# Altium PCB H_Bridge_Rev0.2_to_Pads.PcbDoc
Units mm, origin at the board's own origin, x right, y up, seen from the top; angles counter-clockwise.
Board outline 85 x 80 mm, 2 copper layers (Top Layer, Bottom Layer); 44 components, 27 nets, 117 pads, 176 vias.
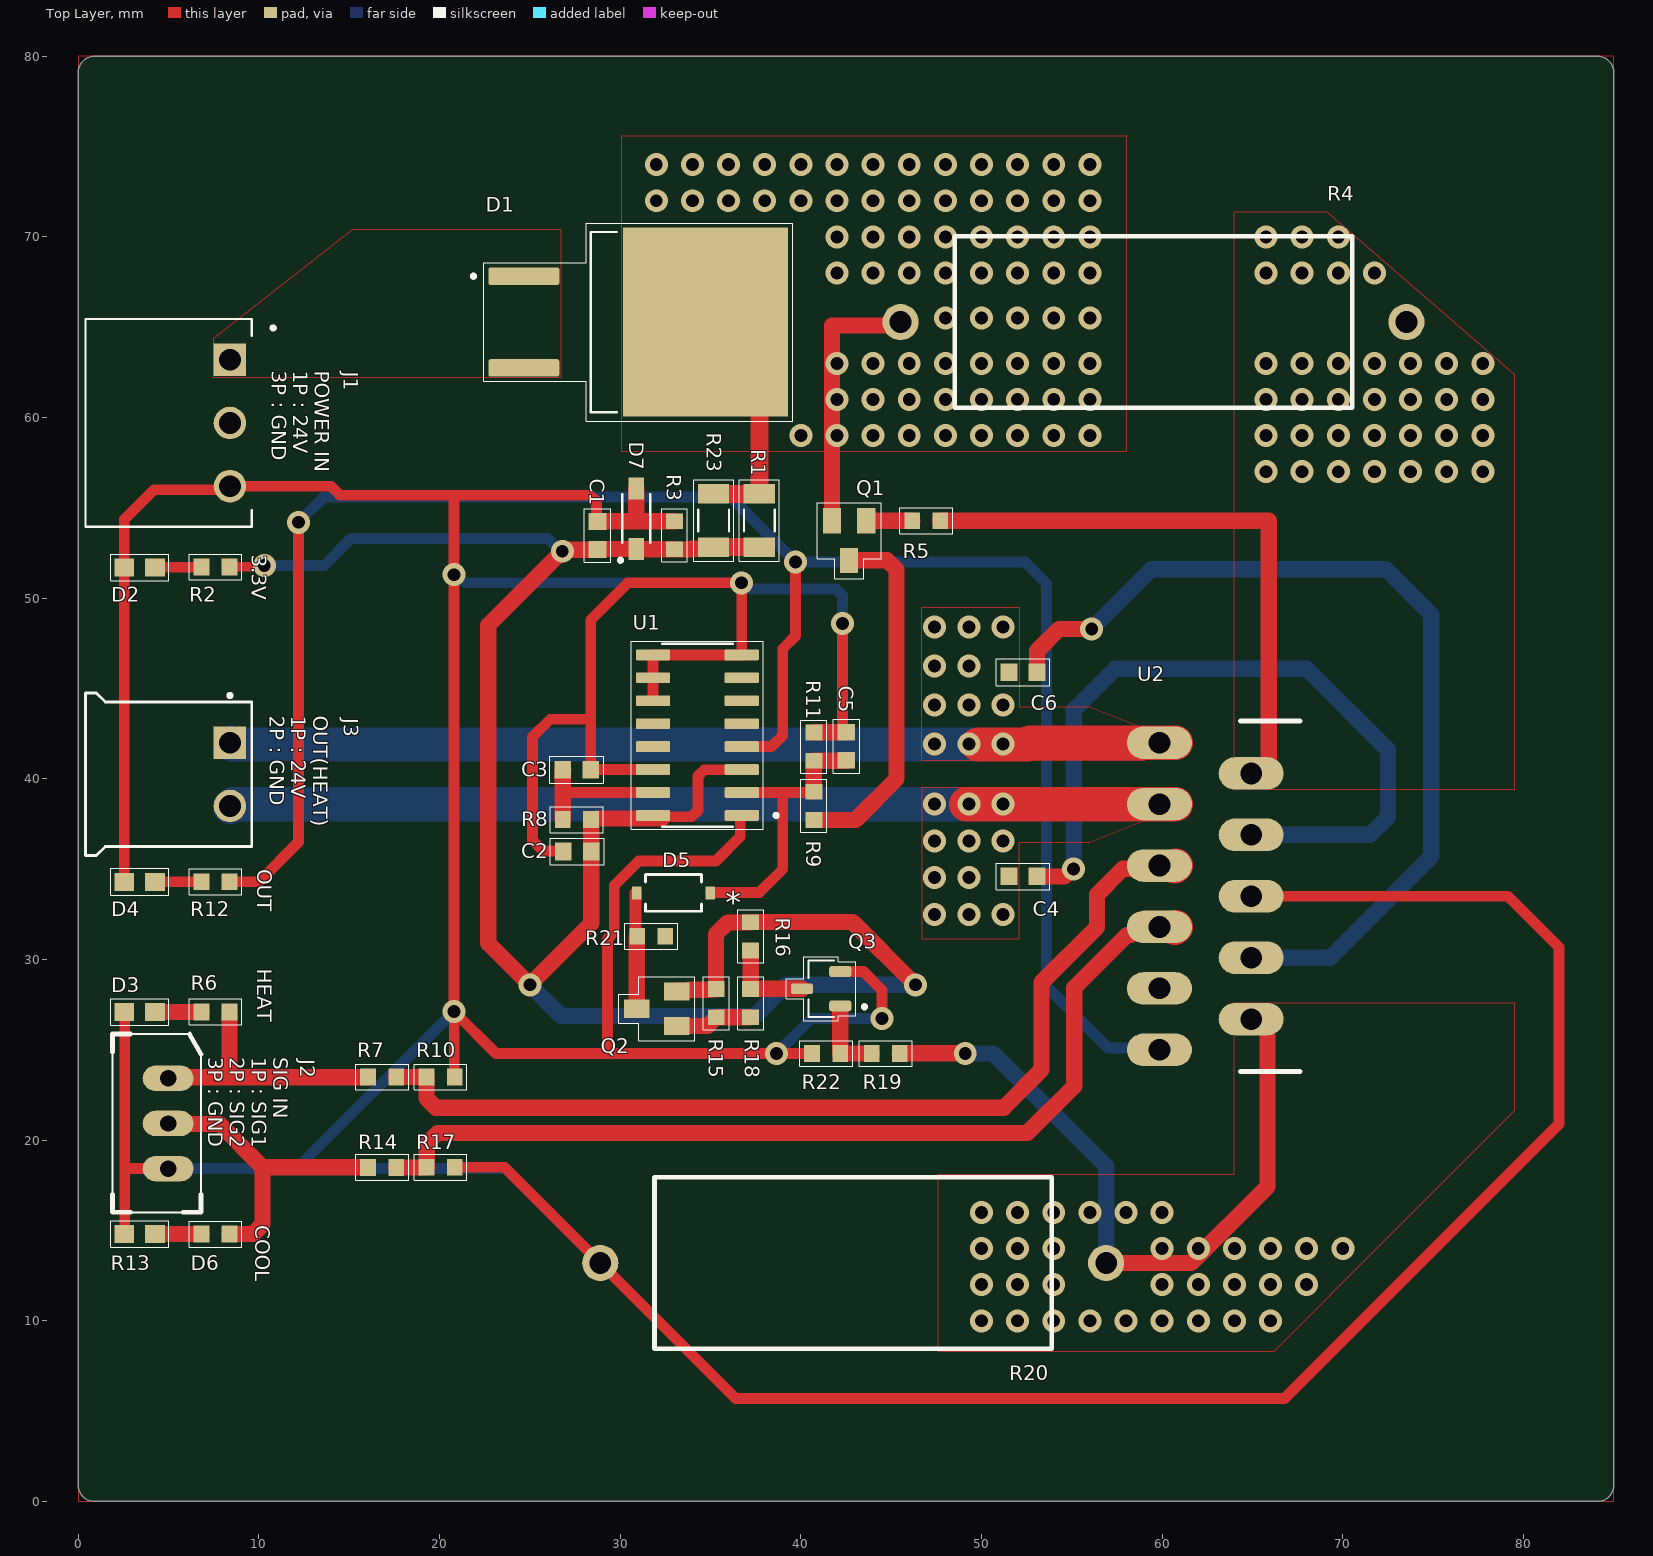
[diagram p0: Top Layer view]
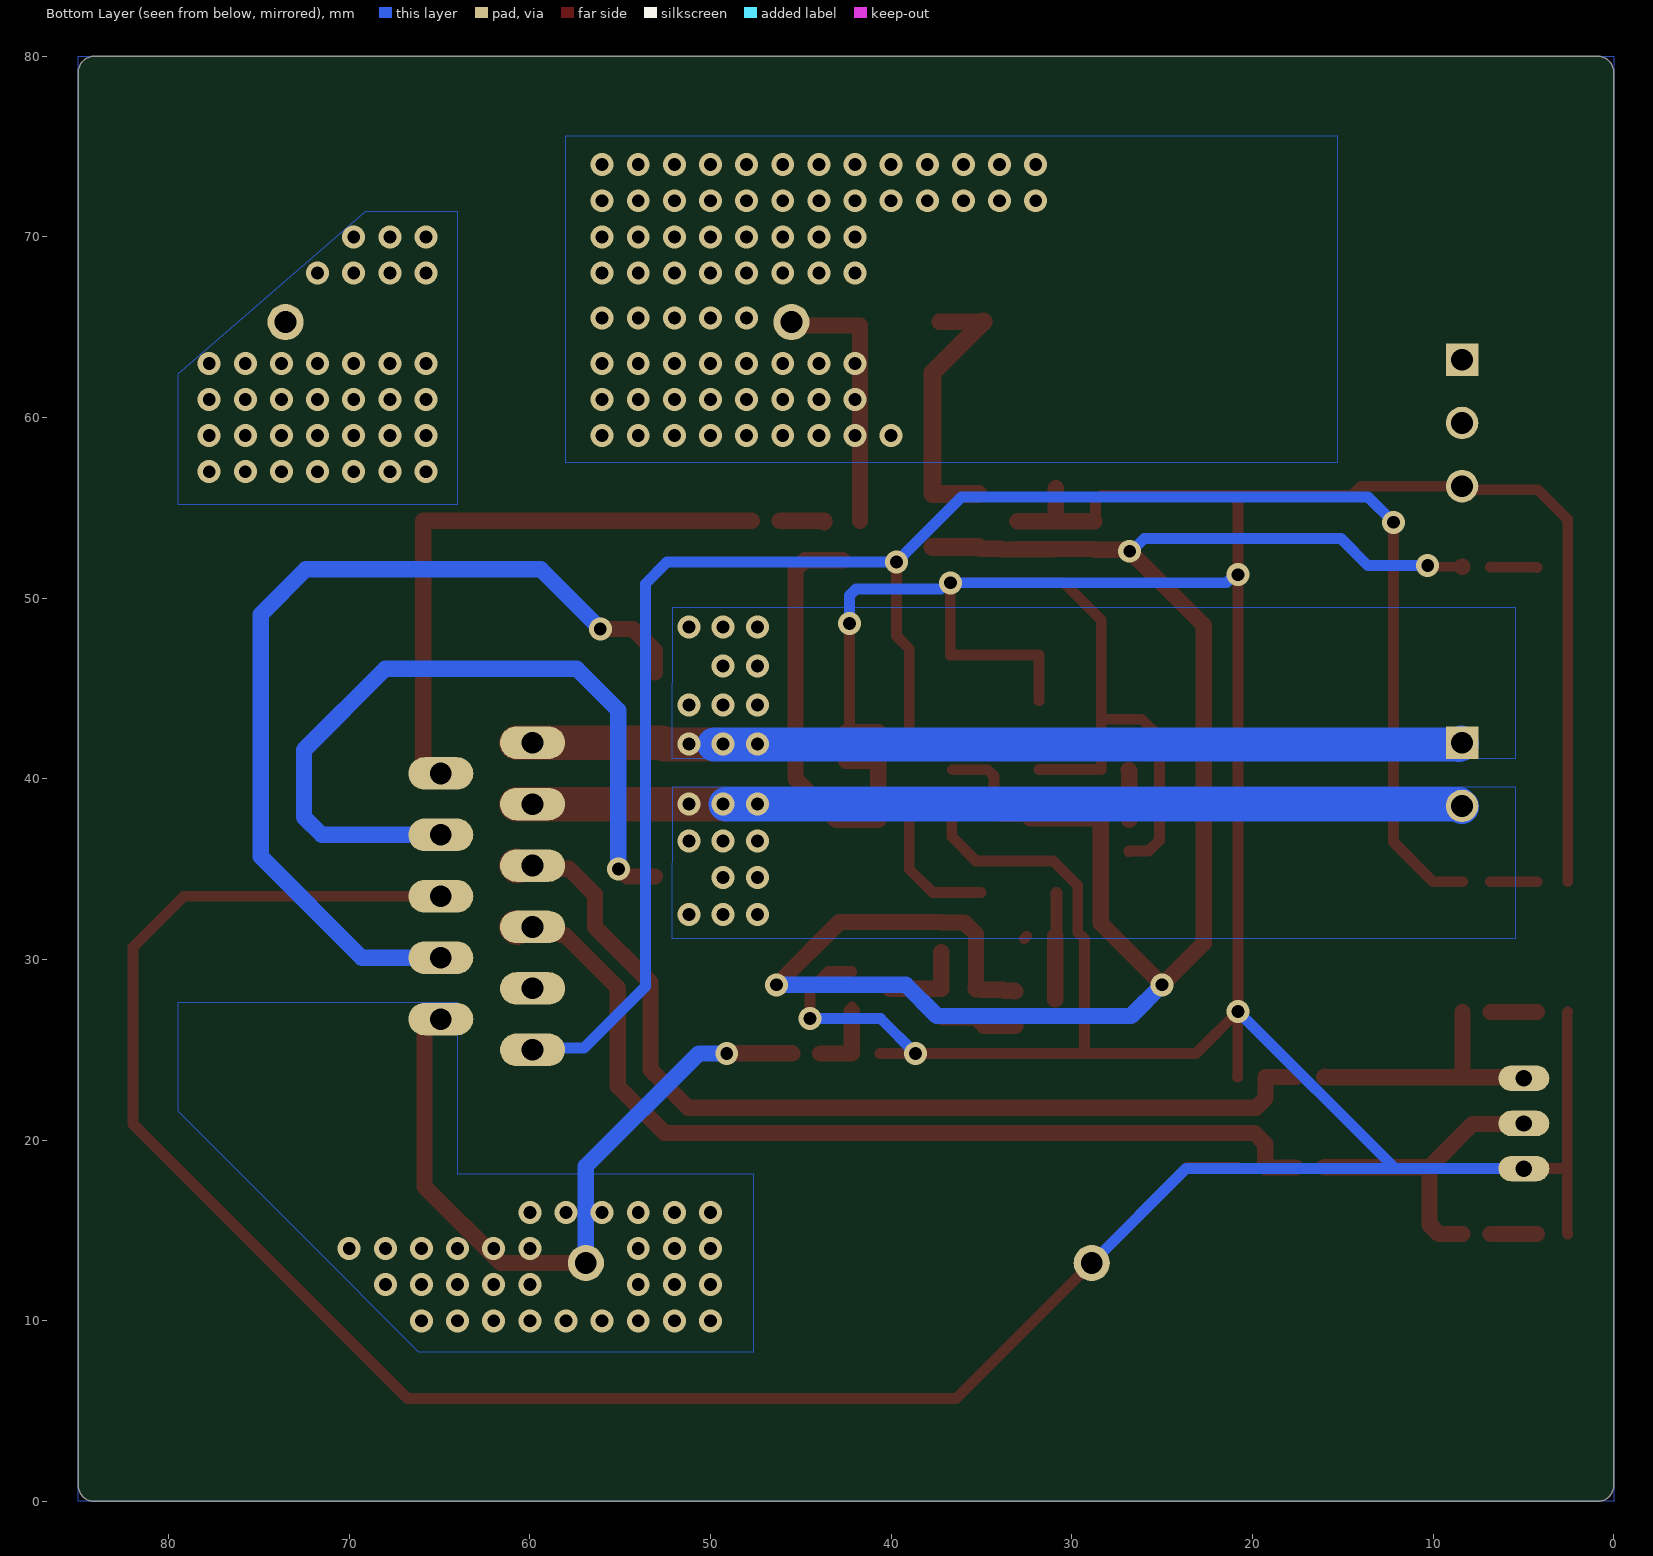
[diagram p1: Bottom Layer view, seen from below]

## Layer stack, top to bottom
Top Solder: solder mask 0.0102, Solder Resist, Dk 3.5
Top Layer: signal copper 0.0356
Dielectric 1: dielectric 0.32, FR-4, Dk 4.8
Bottom Layer: signal copper 0.0356
Bottom Solder: solder mask 0.0102, Solder Resist, Dk 3.5

## Board outline
0,0.9 0,79.1 cw(c0.9,79.1) 0.9,80 84.1,80 cw(c84.1,79.1) 85,79.1 85,0.9 cw(c84.1,0.9) 84.1,0 0.9,0 cw(c0.9,0.9)

## Design rules (kind name [scope] priority, off if disabled: settings)
AssemblyTestPointUsage [All] p0: scope1count=1 scope1_0_kind=Board scope1_0_value=Board scope2count=1 scope2_0_kind=Board scope2_0_value=Board commentlength=0
AssemblyTestpoint [All] p0: scope1count=1 scope1_0_kind=Board scope1_0_value=Board scope2count=1 scope2_0_kind=Board scope2_0_value=Board commentlength=0
Clearance Clearance_atik [All] p0: scope1count=1 scope1_0_kind=Board scope1_0_value=Board scope2count=1 scope2_0_kind=Board scope2_0_value=Board commentlength=0 gap=0.5
Clearance Clearance_atik [All] p1: gap=0.5 ignorepadtopadclearanceinfootprint=FALSE except(0: Arc-Hole Track-Hole SMDPad-Hole THPad-Hole Via-Hole Fill-Hole Poly-Hole Region-Hole Text-Hole; 0.2: Arc-Text Track-Text SMDPad-Text THPad-Text Via-Text Fill-Text Poly-Text Region-Text Text-Text; 0.254: Arc-SMDPad Arc-THPad Arc-Via Track-SMDPad Track-THPad Track-Via SMDPad-SMDPad SMDPad-THPad SMDPad-Via THPad-THPad THPad-Via Via-Via)
ComponentClearance [All] p0: scope1count=1 scope1_0_kind=Board scope1_0_value=Board scope2count=1 scope2_0_kind=Board scope2_0_value=Board commentlength=0 gap=0.254 collisioncheckmode=3
DiffPairsRouting [All] p0: scope1count=1 scope1_0_kind=Board scope1_0_value=Board scope2count=1 scope2_0_kind=Board scope2_0_value=Board commentlength=0
FabricationTestPointUsage [All] p0: scope1count=1 scope1_0_kind=Board scope1_0_value=Board scope2count=1 scope2_0_kind=Board scope2_0_value=Board commentlength=0 valid=0 allowmultiple=FALSE
FabricationTestpoint [All] p0: scope1count=1 scope1_0_kind=Board scope1_0_value=Board scope2count=1 scope2_0_kind=Board scope2_0_value=Board commentlength=0 side=3 testpointundercomponent=TRUE minsize=1.016 maxsize=2.54 preferedsize=1.524 minholesize=0 maxholesize=1.016 preferedholesize=0.813 testpointgrid=0.025
FanoutControl Fanout_BGA [All] p0 off: scope1count=1 scope1_0_kind=Board scope1_0_value=Board scope2count=1 scope2_0_kind=Board scope2_0_value=Board commentlength=69 // Protel DXP Scope 1 Expression Was: IsBGA   Fanout_BGA (Default Rule)
FanoutControl Fanout_LCC [All] p0 off: scope1count=1 scope1_0_kind=Board scope1_0_value=Board scope2count=1 scope2_0_kind=Board scope2_0_value=Board commentlength=69 // Protel DXP Scope 1 Expression Was: IsLCC   Fanout_LCC (Default Rule)
FanoutControl Fanout_SOIC [All] p0 off: scope1count=1 scope1_0_kind=Board scope1_0_value=Board scope2count=1 scope2_0_kind=Board scope2_0_value=Board commentlength=71 // Protel DXP Scope 1 Expression Was: IsSOIC   Fanout_SOIC (Default Rule)
FanoutControl Fanout_Small [All] p0 off: scope1count=1 scope1_0_kind=Board scope1_0_value=Board scope2count=1 scope2_0_kind=Board scope2_0_value=Board commentlength=84 // Protel DXP Scope 1 Expression Was: (CompPinCount < 5)   Fanout_Small (Default Rule)
FanoutControl Fanout_Default [All] p0: scope1count=1 scope1_0_kind=Board scope1_0_value=Board scope2count=1 scope2_0_kind=Board scope2_0_value=Board commentlength=30 // Fanout_Default (Default Rule)
Height [All] p0: scope1count=1 scope1_0_kind=Board scope1_0_value=Board scope2count=1 scope2_0_kind=Board scope2_0_value=Board commentlength=0
Height [All] p1: minheight=0 maxheight=100 prefheight=12.7
HoleSize [All] p0: scope1count=1 scope1_0_kind=Board scope1_0_value=Board scope2count=1 scope2_0_kind=Board scope2_0_value=Board commentlength=0 absolutevalues=TRUE maxlimit=2.54 minlimit=0.025 maxpercent=80.000 minpercent=20.000
HoleToHoleClearance [All] p0: scope1count=1 scope1_0_kind=Board scope1_0_value=Board scope2count=1 scope2_0_kind=Board scope2_0_value=Board commentlength=0
LayerPairs [All] p0: scope1count=1 scope1_0_kind=Board scope1_0_value=Board scope2count=1 scope2_0_kind=Board scope2_0_value=Board commentlength=0 enforce=TRUE
MinimumSolderMaskSliver [All] p0: scope1count=1 scope1_0_kind=Board scope1_0_value=Board scope2count=1 scope2_0_kind=Board scope2_0_value=Board commentlength=0
NetAntennae [All] p0: scope1count=1 scope1_0_kind=Board scope1_0_value=Board scope2count=1 scope2_0_kind=Board scope2_0_value=Board commentlength=0
PasteMaskExpansion [All] p0: scope1count=1 scope1_0_kind=Board scope1_0_value=Board scope2count=1 scope2_0_kind=Board scope2_0_value=Board commentlength=0 expansion=0
PlaneClearance [All] p0: scope1count=1 scope1_0_kind=Board scope1_0_value=Board scope2count=1 scope2_0_kind=Board scope2_0_value=Board commentlength=0 clearance=0.508
PlaneConnect [All] p0: scope1count=1 scope1_0_kind=Board scope1_0_value=Board scope2count=1 scope2_0_kind=Board scope2_0_value=Board commentlength=0 planeconnectstyle=Direct reliefexpansion=0.508 reliefentries=4 reliefconductorwidth=0.254 reliefairgap=0.254
PlaneConnect [All] p1: planeconnectstyle=Direct reliefexpansion=0.508 reliefentries=4 reliefconductorwidth=0.254 reliefairgap=0.254
PolygonConnect [All] p0: scope1count=1 scope1_0_kind=Board scope1_0_value=Board scope2count=1 scope2_0_kind=Board scope2_0_value=Board commentlength=0 connectstyle=Relief reliefconductorwidth=0.254 reliefentries=4 polygonreliefangle="90 Angle"
PolygonConnect [All] p1: connectstyle=Relief reliefconductorwidth=0.254 reliefentries=4 polygonreliefangle="90 Angle" airgapwidth=0.254
RoomDefinition H_Bridge_Rev0.2 [All] p0: scope1count=1 scope1_0_kind=ComponentClass scope1_0_value=H_Bridge_Rev0.2 scope2count=1 scope2_0_kind=Board scope2_0_value=Board commentlength=0 region_x1=16150000 region_y1=22324016 region_x2=49614567 region_y2=53820079 confinementstyle=ConfineIn
RoomDefinition H_Bridge_Rev0.2 [InComponentClass('H_Bridge_Rev0.2')] p1: confinementstyle=ConfineIn formatcopy=TRUE lockcomponents=FALSE outline 0,0 85,0 85,80 0,80
RoutingCorners [All] p0: scope1count=1 scope1_0_kind=Board scope1_0_value=Board scope2count=1 scope2_0_kind=Board scope2_0_value=Board commentlength=0 cornerstyle=45-Degree minsetback=2.54 maxsetback=2.54
RoutingLayers [All] p0: scope1count=1 scope1_0_kind=Board scope1_0_value=Board scope2count=1 scope2_0_kind=Board scope2_0_value=Board commentlength=0 top layer=Automatic bottom layer=Automatic
RoutingPriority [All] p0: scope1count=1 scope1_0_kind=Board scope1_0_value=Board scope2count=1 scope2_0_kind=Board scope2_0_value=Board commentlength=0
RoutingTopology [All] p0: scope1count=1 scope1_0_kind=Board scope1_0_value=Board scope2count=1 scope2_0_kind=Board scope2_0_value=Board commentlength=0 topology=Shortest
RoutingVias [All] p0: scope1count=1 scope1_0_kind=Board scope1_0_value=Board scope2count=1 scope2_0_kind=Board scope2_0_value=Board commentlength=0 holewidth=0.711 width=1.27 viastyle="Through Hole" minholewidth=0.711 minwidth=1.27 maxholewidth=0.711 maxwidth=1.27
RoutingVias [All] p1: holewidth=0.711 width=1.27 viastyle="Through Hole" minholewidth=0.711 minwidth=1.27 maxholewidth=0.711 maxwidth=1.27
ShortCircuit [All] p0: scope1count=1 scope1_0_kind=Board scope1_0_value=Board scope2count=1 scope2_0_kind=Board scope2_0_value=Board commentlength=0 allowed=FALSE
SilkToBoardRegionClearance [All] p0: scope1count=1 scope1_0_kind=Board scope1_0_value=Board scope2count=1 scope2_0_kind=Board scope2_0_value=Board commentlength=0
SilkToSilkClearance [All] p0: scope1count=1 scope1_0_kind=Board scope1_0_value=Board scope2count=1 scope2_0_kind=Board scope2_0_value=Board commentlength=0
SilkToSilkClearance [All] p1: silktosilkclearance=0.05
SilkToSolderMaskClearance [All] p0 off: scope1count=1 scope1_0_kind=Board scope1_0_value=Board scope2count=1 scope2_0_kind=Board scope2_0_value=Board commentlength=44 // Protel DXP Scope 1 Expression Was: IsPad
SilkToSolderMaskClearance [IsPad] p1: minsilkscreentomaskgap=0.05 clearancetoexposedcopper=TRUE
SolderMaskExpansion [All] p0: scope1count=1 scope1_0_kind=Board scope1_0_value=Board scope2count=1 scope2_0_kind=Board scope2_0_value=Board commentlength=0 expansion=0.102
SolderMaskExpansion [All] p1: expansion=0.102 istentingtop=FALSE
UnRoutedNet [All] p0: scope1count=1 scope1_0_kind=Board scope1_0_value=Board scope2count=1 scope2_0_kind=Board scope2_0_value=Board commentlength=0
UnpouredPolygon [All] p0: scope1count=1 scope1_0_kind=Board scope1_0_value=Board scope2count=1 scope2_0_kind=Board scope2_0_value=Board commentlength=0
Width [All] p0: scope1count=1 scope1_0_kind=Board scope1_0_value=Board scope2count=1 scope2_0_kind=Board scope2_0_value=Board commentlength=0 maxlimit=4 minlimit=0.15 preferedwidth=0.254
Width [All] p1: maxlimit=4 minlimit=0.15 preferedwidth=0.254 minimp=50.000000 maximp=50.000000 favimp=50.000000
26 further rules are at their usual default settings.

## Components (designator, comment, footprint, x,y, rotation, side; value= is the part's Value field where it differs from the comment)
C1 "0.1u" C1608 28.744,53.468 r270 top
C2 "0.1u" C1608 27.621,35.983 r0 top
C3 "4.7u" C1608 27.6,40.5 r180 top
C4 "C1608" C1608 52.3,34.6 r0 top
C5 "10u" C1608 42.521,41.808 r270 top
C6 "C1608" C1608 52.3,45.9 r180 top
D1 "MBRB1045T4G" TO254P1524X483-3 31.001,65.283 r0 top
D2 "LTST-C191KGKT" 0603 3.4,51.7 r0 top
D3 "LTST-C191KRKT" 0603 3.4,27.1 r0 top
D4 "LTST-C191KSKT" 0603 3.4,34.3 r0 top
D5 "1N4148W-TP" SOD123 32.953,33.683 r180 top
D6 "LTST-C191TBKT" 0603 3.4,14.8 r0 top
D7 "MMSZ5226B-7-F" SOD3715X135L32X57N 30.888,54.4 r90 top
J1 "284512-3" TE_284512-3 8.4,59.7 r90 top
J2 "0022035035" MOLEX22035035 4.979,20.924 r270 top
J3 "284512-2" TE_284512-2 5,40.25 r270 top
Q1 "MMBT2907*" SOT23-BEC 42.671,53.183 r180 top
Q2 "MMBT2907*" SOT23-BEC 32.025,27.275 r90 top
Q3 "MMBT2222ALT1" SOT95P237X111-3N 41.121,28.383 r180 top
R1 "4.7k/3216" R3216 37.7,54.3 r270 top
R2 "3.3k" R1608 7.6,51.725 r180 top
R3 "NA_2.4k" R1608 33.008,53.483 r270 top
R4 "RES_CEMENT" RES_CEMENT 59.521,65.283 r180 top
R5 "100R" R1608 46.941,54.283 r0 top
R6 "6.8k" R1608 7.6,27.1 r0 top
R7 "15k" R1608 16.821,23.5 r180 top
R8 "330K_F" R1608 27.6,37.742 r0 top
R9 "6.8k" R1608 40.721,38.503 r270 top
R10 "5.6k" R1608 20.055,23.5 r180 top
R11 "1k" R1608 40.721,41.783 r270 top
R12 "470R" R1608 7.6,34.3 r0 top
R13 "6.8k" R1608 7.6,14.8 r0 top
R14 "15k" R1608 16.821,18.492 r180 top
R15 "10k" R1608 35.321,27.583 r90 top
R16 "2.2k" R1608 37.221,31.283 r90 top
R17 "5.6k" R1608 20.055,18.5 r180 top
R18 "220R" R1608 37.221,27.583 r90 top
R19 "220R" R1608 44.7,24.8 r0 top
R20 "RES_CEMENT" RES_CEMENT 42.9,13.2 r0 top
R21 "2.2k" R1608 31.721,31.283 r180 top
R22 "10k" R1608 41.4,24.8 r0 top
R23 "4.7k/3216" R3216 35.172,54.3 r270 top
U1 "74LV123D,118" SOIC127P600X175-16N 34.276,42.418 r180 top
U2 "L6203" MULTIWATT-11 66.2,33.5 r270 top

## Footprints (in the part's own frame and the unit in brackets; to place one, negate y for a bottom-side part, rotate by r counter-clockwise, add the part's x,y. Pads: shape width x height; smd on the part's side, far side on the other; paste and mask are expansions set on the pad)
0603 [mm]
  rect 1.1x1 smd: 1(-0.85,0) 2(0.85,0)
  silkscreen extent -1.61,-0.74 1.63,0.74
C1608 [mm]
  rect 0.92x0.98 smd: 1(-0.775,0) 2(0.775,0)
  silkscreen extent -1.49,-0.74 1.49,0.74
MOLEX22035035 [mm]
  oval 1.408x2.816 hole 0.9: 1(-2.5,0) 2(0,0) 3(2.5,0)
  silkscreen extent -4.95,-3.08 4.93,1.82
MULTIWATT-11 [mm]
  oval 1.8x3.6 hole 1.2: 1(-8.5,-6.35) 2(-6.8,-1.27) 3(-5.1,-6.35) 4(-3.4,-1.27) 5(-1.7,-6.35) 6(0,-1.27) 7(1.7,-6.35) 8(3.4,-1.27) 9(5.1,-6.35) 10(6.8,-1.27) 11(8.5,-6.35)
  silkscreen extent -9.7,-1.87 9.7,1.43
R1608 [mm]
  rect 0.87x0.93 smd: 1(-0.78,0) 2(0.78,0)
  silkscreen extent -1.47,-0.71 1.47,0.71
R3216 [mm]
  rect 1.08x1.72 smd: 1(-1.47,0) 2(1.47,0)
  silkscreen extent -2.26,-1.11 2.26,1.11
RES_CEMENT [mm]
  round 2 hole 1.2: 1(-14,0) 2(14,0)
  silkscreen extent -11,-4.75 11,4.75
SOD123 [mil]
  rect 20x28 smd: 1(-80,0) 2(80,0)
  silkscreen extent -61,-40 61,40
SOD3715X135L32X57N [mm]
  rect 1.21x0.84 smd: 1(-1.68,0) 2(1.68,0)
  silkscreen extent -2.4,-0.77 1.35,0.97
SOIC127P600X175-16N [mm]
  rrect25% 1.9x0.6 smd: 1(-2.455,4.445) 2(-2.455,3.175) 3(-2.455,1.905) 4(-2.455,0.635) 5(-2.455,-0.635) 6(-2.455,-1.905) 7(-2.455,-3.175) 8(-2.455,-4.445) 9(2.455,-4.445) 10(2.455,-3.175) 11(2.455,-1.905) 12(2.455,-0.635) 13(2.455,0.635) 14(2.455,1.905) 15(2.455,3.175) 16(2.455,4.445)
  silkscreen extent -4.45,-5.2 3.65,5.2
SOT23-BEC [mm]
  rect 1x1.4 smd: B(-0.95,-1.1) C(0,1.1) E(0.95,-1.1)
  silkscreen extent -1.78,-2.1 1.76,2.1
SOT95P237X111-3N [mm]
  rrect50% 1.23x0.6 smd: 1(-1.06,0.95) 2(-1.06,-0.95) 3(1.06,0)
  silkscreen extent -2.5,-1.77 1.93,1.77
TE_284512-2 [mm]
  rect 1.8x1.8 hole 1.2: 1(-1.75,3.4)
  round 1.8 hole 1.2: 2(1.75,3.4)
  silkscreen extent -4.5,-4.6 4.5,4.6
TE_284512-3 [mm]
  rect 1.8x1.8 hole 1.2: 1(3.5,0)
  round 1.8 hole 1.2: 2(0,0) 3(-3.5,0)
  silkscreen extent -5.75,-2.49 5.75,8
TO254P1524X483-3 [mm]
  rrect25% 3.93x0.97 smd: 1(-6.33,2.54) 3(-6.33,-2.54)
  rect 9.15x10.46 smd: 4(3.72,0)
  silkscreen extent -9.22,-5.48 8.55,5.48

## Part data
C1 C2 C3 C5: library part C1608, "CAP1608"
C4 C6: "CAP1608"
D1: "Diode Schottky 45 V 10A Surface Mount DA©÷PAK"
D2 D4 D6: library part LTST-C191KRKT, "Red 631nm LED Indication - Discrete 2V 0603 _1608 Metric_"
D3: "Red 631nm LED Indication - Discrete 2V 0603 _1608 Metric_"
D5: "Diode Standard 100V 150mA Surface Mount SOD-123"
D7: "Zener Diode 3.3V 500mW A【5% Surface Mount SOD-123"
J1: "Pluggable terminal block; socket; male; angled; 3.5mm;"
J2: library part 0022035045, "Connector Header Through Hole 4 position 0.098 _2.50mm_"
J3: "Terminal Block Header, 2, 300 V, 11 A, 3.5 mm, Through Hole Right Angle, Header"
Q1 Q2: "Bipolar _BJT_ Transistor PNP 60V 600mA 200MHz 300mW Surface Mount SOT-23-3"
Q3: "Bipolar (BJT) Transistor NPN 40V 600mA 300MHz 225mW Surface Mount SOT-23"
R1 R23: library part R3216, "Res 3216"
R2 R3 R5 R6 R7 R8 R9 R10 R11 R12 R13 R14 R15 R16 R17 R18 R19 R21 R22: library part R1608, "R1608"
U1: "Monostable Multivibrator Dual-Element -40A∑C 125A∑C Automotive 16-Pin SO T/R"
U2: "Half Bridge _2_ Driver DC Motors, General Purpose BCDMOS 11-Multiwatt"

## Via types
v1: diameter 1.27, hole 0.711, Top Layer to Bottom Layer, 176 vias

## Nets (pads, with @x,y where several pads share a name; then routed paths per layer and width w, separated by ;. In a path a pad name is that pad's centre, name@x,y a point inside that pad or via, vN(x,y) a via of type N, cw(c..) or ccw(c..) an arc to the next point about the centre after c; other vN are vias at no path point)
+3.3V: C1.2 C2.2 D7.1 Q2.E R1.2 R2.1 R3.2 R8.2 R15.2 R16.2 R23.2 U1.3 U1.16 | length 118.7
  Top Layer w0.5: R2.1@8.395,51.74 v1@10.24,51.74
  Top Layer w0.6: U1.16@32.3,37.8 32.4,37.9 33.949,37.9 34.3,38.251 34.3,40.149 34.651,40.5 U1.3@36.6,40.5
  Top Layer w0.9: R2.1 R2.1@8.395,51.74 ; v1@10.24,51.74 v1(10.3,51.8) ; R8.2 28.395,37.757 28.68,37.757 28.723,37.8 U1.16@32.3,37.8 ; R8.2@28.4,37.7 28.4,35.987 C2.2 28.4,35.979 28.4,32 27.873,31.473 v1(25,28.6) 22.7,30.9 22.7,48.5 v1(26.796,52.596) 26.897,52.596 26.983,52.683 28.734,52.683 C1.2 28.774,52.693 28.801,52.72 D7.1 ; D7.1@31.044,52.693 31.054,52.703 R3.2 33.011,52.7 33.9,52.7 33.94,52.74 35.082,52.74 R23.2 ; Q2.E 33.175,28.275 33.739,28.275 33.789,28.325 34.998,28.325 35.021,28.348 35.306,28.348 R15.2 ; R15.2@35.306,28.378 35.306,30.178 35.3,30.184 35.3,31.4 35.948,32.048 37.206,32.048 R16.2 37.236,32.078 42.86,32.078 v1(46.337,28.6)
  Top Layer w1: R23.2 R1.2
  Bottom Layer w0.6: v1(10.3,51.8) 13.6,51.8 15.1,53.3 25.993,53.3 v1@26.696,52.596
  Bottom Layer w0.9: v1(25,28.6) 26.725,26.875 37.466,26.875 39.191,28.6 v1(46.337,28.6) ; v1@26.696,52.596 v1(26.796,52.596)
+24V: D1.4 Q1.E R1.1 R4.2 R23.1 | length 29.8
  Top Layer w0.9: D1.4@34.9,65.3 D1.4@37.321,65.3 ; Q1.E 41.721,65.1 R4.2@45.1,65.1
  Top Layer w1: D1.4@34.9,65.3 37.7,62.5 R1.1 R23.1
  other v1: 40,59 42,59 44,59 46,59 48,59 50,59 52,59 54,59 56,59 42,61 44,61 46,61 48,61 50,61 52,61 54,61 56,61 42,63 44,63 46,63 48,63 50,63 52,63 54,63 56,63 48,65.5 50,65.5 52,65.5 54,65.5 56,65.5 42,68 44,68 46,68 48,68 50,68 52,68 54,68 56,68 42,70 44,70 46,70 48,70 50,70 52,70 54,70 56,70 32,72 34,72 36,72 38,72 40,72 42,72 44,72 46,72 48,72 50,72 52,72 54,72 56,72 32,74 34,74 36,74 38,74 40,74 42,74 44,74 46,74 48,74 50,74 52,74 54,74 56,74
GND: C1.1 C2.1 C3.1 C5.1 D2.1 D3.1 D4.1 D6.1 D7.2 J1.3 J2.3 Q3.2 R3.1 R10.1 R11.1 R17.1 R20.1 R21.1 R22.1 U1.1 U1.8 U1.9 U1.10 U1.11 U1.14 U2.6 | length 365.5
  Top Layer w0.6: D6.1 2.576,14.826 2.576,18.424 ; D3.1 2.576,27.074 2.576,18.424 ; D4.1 D2.1 2.55,54.35 4.2,56 8.2,56 J1.3 14,56.2 14.5,55.7 20.8,55.7 ; J2.3 2.576,18.424 ; R17.1 23.6,18.5 27.225,14.875 R20.1 36.4,5.7 66.775,5.7 81.975,20.9 81.975,30.674 79.149,33.5 U2.6 ; R10.1 20.818,23.518 v1@20.818,27.107 ; C2.1 26.829,36 25.75,36 25.15,36.6 25.15,42.325 26.125,43.3 28.375,43.3 ; C3.1 28.375,43.3 ; C3.1@28.613,40.513 U1.14 ; C1.1@28.698,54.289 28.698,55.349 28.347,55.7 20.8,55.7 ; U1.11 U1.10 U1.9 U1.8 36.731,50.844 v1(36.725,50.85) 30.425,50.85 28.375,48.8 28.375,43.3 ; R21.1 R21.1@32.636,31.148 ; R3.1@33.169,54.253 R3.1@33.187,54.27 ; U1.1 36.65,37.973 36.65,36.8 35.297,35.447 31.024,35.447 29.671,34.095 29.671,31.503 29.3,31.132 29.3,24.8 ; R22.1 v1(38.65,24.8) 29.3,24.8 ; Q3.2 43.467,29.333 44.5,28.3 v1(44.5,26.725) ; v1(42.3,48.6) 42.3,42.804 42.331,42.773 42.331,42.743 42.491,42.583 C5.1 ; 20.8,55.7 v1(20.8,51.3) v1(20.8,27.125) v1@20.818,27.107 ; v1@20.818,27.107 23.125,24.8 29.3,24.8
  Top Layer w0.9: C1.1 28.774,54.243 28.794,54.263 30.901,54.263 ; D7.2 30.888,54.275 30.901,54.263 ; R3.1 30.901,54.263 ; R11.1 40.721,42.583 C5.1@42.491,42.583
  Bottom Layer w0.6: J2.3 12.099,18.424 ; v1(20.8,27.125) 12.099,18.424 ; v1(20.8,51.3) 20.981,51.3 21.431,50.85 v1(36.725,50.85) ; R20.1 23.676,18.424 12.099,18.424 ; 37.256,50.5 41.949,50.5 42.3,50.149 v1(42.3,48.6) ; v1(38.65,24.8) 40.575,26.725 v1(44.5,26.725)
NetC3_2: C3.2 R8.1 U1.15 | length 7.7
  Top Layer w0.6: 26.9,39.2 26.943,39.243 U1.15
  Top Layer w0.9: R8.1 26.82,40.427 26.846,40.453 C3.2@26.846,40.483
NetC4_1: C4.1 J3.2 U2.3 | length 53.3
  Top Layer w0.5: 51.925,38.225 52.135,38.435 52.5,38.435 52.665,38.6
  Top Layer w1.9: v1@49.15,38.6 52.665,38.6 U2.3@60.75,38.6
  Bottom Layer w1.9: J3.2@8.4,38.45 8.55,38.6 v1@49.15,38.6
  other v1: 47.4,32.5 49.3,32.5 51.2,32.5 47.4,34.533 49.3,34.533 47.4,36.567 49.3,36.567 51.2,36.567 47.4,38.6 49.3,38.6 51.2,38.6
NetC4_2: C4.2 U2.4 | length 42
  Top Layer w0.9: C4.2 54.6,34.6 55,35 v1(55.1,35)
  Bottom Layer w0.9: v1(55.1,35) 55.1,43.8 57.4,46.1 68,46.1 72.5,41.6 72.5,37.875 71.525,36.9 U2.4@65.83,36.9
NetC5_2: C5.2 D5.1 R9.1 R11.2 U1.2 | length 16.3
  Top Layer w0.6: D5.1@35.031,33.7 37.7,33.7 39,35 39,39.243 ; U1.2 39,39.243 ; R9.1@40.725,39.175 40.657,39.243 39,39.243
  Top Layer w0.9: R9.1@40.7,39.3 40.721,39.321 R11.2 42.497,41.003 C5.2@42.5,41
NetC6_1: C6.1 U2.8 | length 50.7
  Top Layer w0.9: C6.1 53.075,47.075 54.3,48.3 v1(56.1,48.3)
  Bottom Layer w0.9: v1(56.1,48.3) 59.4,51.6 72.4,51.6 74.9,49.1 74.9,35.7 69.3,30.1 U2.8@65.83,30.1
NetC6_2: C6.2 J3.1 U2.1 | length 53.4
  Top Layer w0.5: 51.925,42.4 52.135,42.19 52.475,42.19 52.665,42
  Top Layer w1.9: v1@49.8,41.9 52.565,41.9 52.665,42 U2.1@60.75,42
  Bottom Layer w1.9: J3.1@8.4,41.95 8.45,42 8.577,41.873 8.604,41.9 v1@49.8,41.9
  other v1: 47.4,41.929 49.3,41.929 51.183,41.929 47.4,44.086 49.3,44.086 51.183,44.086 47.4,46.243 49.3,46.243 47.4,48.4 49.3,48.4 51.183,48.4
NetD1_1: D1.1 D1.3 J1.1
NetD2_2: D2.2 R2.2 | length 2.6
  Top Layer w0.6: D2.2 4.263,51.713 6.807,51.713 R2.2
NetD3_2: D3.2 R6.1 | length 2.6
  Top Layer w0.9: D3.2 R6.1
NetD4_2: D4.2 R12.1 | length 2.6
  Top Layer w0.6: D4.2 R12.1
NetD5_2: D5.2 Q2.C R21.2 | length 6
  Top Layer w0.5: D5.2@30.85,33.683 D5.2
  Top Layer w0.65: D5.2@30.85,33.683 30.85,31.374 R21.2
  Top Layer w0.9: 30.921,27.783 30.921,31.271 R21.2@30.925,31.275
NetD6_2: D6.2 R13.1 | length 2.6
  Top Layer w0.6: D6.2 D6.2@4.265,14.815
  Top Layer w0.9: D6.2 R13.1
NetJ2_1: J2.1 R6.2 R7.2 | length 14.7
  Top Layer w0.9: J2.1 5.04,23.485 8.4,23.485 ; R6.2 8.38,23.505 8.4,23.485 ; R7.2@15.997,23.503 R7.2@16,23.5 ; R7.2 16.026,23.485 8.4,23.485
NetJ2_2: J2.2 R13.2 R14.2 | length 17.3
  Top Layer w0.9: J2.2 5.002,20.9 7.8,20.9 10.2,18.5 ; R13.2 9.673,14.8 10.2,15.327 10.2,18.5 ; R14.2 16.033,18.5 10.2,18.5
NetQ1_B: Q1.B R5.1 | length 2.5
  Top Layer w0.9: Q1.B@43.7,54.2 43.7,54.283 R5.1
NetQ1_C: Q1.C R9.2 | length 19.9
  Top Layer w0.9: R9.2 43.023,37.723 45.3,40 45.3,51.573 44.773,52.1 42.688,52.1 Q1.C
NetQ2_B: Q2.B R15.1 R18.1 | length 4.2
  Top Layer w0.9: Q2.B 34.843,26.325 R15.1 37.172,26.803 R18.1@37.175,26.8
NetQ3_1: Q3.1 R19.1 R22.2 | length 4.4
  Top Layer w0.5: 42.175,27.125 42.175,27.427 Q3.1
  Top Layer w0.9: 42.175,27.125 42.18,27.12 R22.2 R19.1
NetQ3_3: Q3.3 R16.1 R18.2 | length 4.7
  Top Layer w0.9: R18.2 37.221,30.396 R16.1@37.225,30.4 ; R18.2@37.375,28.4 37.392,28.383 Q3.3
NetR4_1: R4.1 R5.2 U2.2 | length 32.2
  Top Layer w0.9: R5.2 65.9,54.283 U2.2@65.9,40.3
  other v1: 65.75,57 67.75,57 69.75,57 71.75,57 73.75,57 75.75,57 77.75,57 65.75,59 67.75,59 69.75,59 71.75,59 73.75,59 75.75,59 77.75,59 65.75,61 67.75,61 69.75,61 71.75,61 73.75,61 75.75,61 77.75,61 65.75,63 67.75,63 69.75,63 71.75,63 73.75,63 75.75,63 77.75,63 65.75,68 67.75,68 69.75,68 71.75,68 65.75,70 67.75,70 69.75,70
NetR7_1: R7.1 R10.2 U2.5 | length 53.8
  Top Layer w0.9: R7.1 R10.2@19.1,23.5 ; R10.2@19.275,23.485 19.275,22.327 19.802,21.8 46.4,21.8 51.225,21.8 53.325,23.9 53.325,28.725 56.4,31.8 56.4,33.6 57.828,35.028 60.578,35.028 U2.5@60.7,35.15
  Top Layer w1.9: U2.5@60.7,35.15 U2.5@60.75,35.2
  Bottom Layer w0.9: U2.5@60.762,35.238 U2.5@60.8,35.2
NetR12_2: R12.2 U1.4 U2.11 | length 109.7
  Top Layer w0.6: R12.2 10,34.3 12.2,36.5 v1(12.2,54.2) ; U1.4 38.383,41.783 39,42.4 39,47.2 39.7,47.9 v1(39.7,52)
  Bottom Layer w0.6: v1(12.2,54.2) 13.6,55.6 36.1,55.6 v1(39.7,52) 52.4,52 53.6,50.8 53.6,28.5 57,25.1 60.65,25.1 U2.11@60.75,25
NetR14_1: R14.1 R17.2 U2.7 | length 52.7
  Top Layer w0.9: R14.1 19.192,18.492 R17.2@19.2,18.5 ; R17.2 19.29,18.515 19.29,18.8 19.29,19.79 19.9,20.4 52.55,20.4 55.137,22.988 55.137,28.437 58.05,31.35 58.256,31.35 58.656,31.75 U2.7@60.7,31.75
  Top Layer w1.9: U2.7@60.7,31.75 U2.7@60.75,31.8
  Bottom Layer w0.9: U2.7@60.75,31.8 60.8,31.8 U2.7@60.9,31.9
NetR19_2: R19.2 R20.2 U2.10 | length 39.3
  Top Layer w0.9: R19.2 45.495,24.815 49.085,24.815 v1(49.1,24.8) ; R20.2 61.6,13.2 65.83,17.43 U2.10@65.83,26.7
  Bottom Layer w0.9: v1(49.1,24.8) 50.65,24.8 56.9,18.55 R20.2
  other v1: 50,10 52,10 54,10 56,10 58,10 60,10 62,10 64,10 66,10 50,12 52,12 54,12 60,12 62,12 64,12 66,12 68,12 50,14 52,14 54,14 60,14 62,14 64,14 66,14 68,14 70,14 50,16 52,16 54,16 56,16 58,16 60,16
pads on no net: J1.2 U1.5 U1.6 U1.7 U1.12 U1.13 U2.9

## Polygon pours and split planes (outlines as drawn)
GND on Top Layer "GND_L01_P019" (solid, pour order 19): 0,80 0,0 85,0 85,80
NetR4_1 on Top Layer "NETR4_1_L01_P016" (solid, pour order 16): 69.1,71.4 79.5,62.4 79.5,39.4 64,39.4 64,71.4
NetC6_2 on Top Layer "NETC6_2_L01_P010" (solid, pour order 10): 46.7,41 46.7,49.5 52.1,49.5 52.1,44 56,44 59,42.8 59,41
NetC4_1 on Top Layer "NETC4_1_L01_P009" (solid, pour order 9): 46.7,39.5 46.7,31.15 52.1,31.15 52.1,36.5 56,36.5 59,37.7 59,39.5
NetR19_2 on Top Layer "NETR19_2_L01_P003" (solid, pour order 3): 79.5,27.6 79.5,21.625 72.412,14.537 66.175,8.3 47.6,8.3 47.6,18.1 64,18.1 64,27.6
+24V on Top Layer "+24V_L01_P001" (solid, pour order 1): 30.1,75.6 58,75.6 58,58.1 30.1,58.1
NetD1_1 on Top Layer "NETD1_1_L01_P008" (solid, pour order 8): 26.7,70.408 26.7,62.2 15.2,62.2 7.5,62.2 7.5,64.4 15.2,70.408
GND on Bottom Layer "GND_L02_P020" (solid, pour order 20): 0,80 0,0 85,0 85,80
NetR19_2 on Bottom Layer "NETR19_2_L02_P017" (solid, pour order 17): 79.5,27.6 79.5,21.625 72.625,14.75 66.175,8.3 47.6,8.3 47.6,18.1 64,18.1 64,27.6
NetC6_2 on Bottom Layer "NETC6_2_L02_P007" (solid, pour order 7): 52.081,49.5 5.45,49.5 5.45,41.1 52.119,41.1
NetR4_1 on Bottom Layer "NETR4_1_L02_P013" (solid, pour order 13): 69.1,71.4 79.5,62.4 79.5,55.2 64,55.2 64,71.4
NetC4_1 on Bottom Layer "NETC4_1_L02_P006" (solid, pour order 6): 52.085,39.55 5.45,39.55 5.45,31.15 52.116,31.15
+24V on Bottom Layer "+24V_L02_P012" (solid, pour order 12): 15.3,57.5 58,57.5 58,75.6 15.3,75.6

## Silkscreen, mask and mechanical layers (free items; w line width, h text height)
Top Overlay:
  text "POWER IN / 1P : 24V / 3P : GND" at 10.7,62.6 h0.8 r270
  text "3.3V" at 9.6,52.4 h0.8 r270
  text "OUT(HEAT) / 1P : 24V / 2P : GND" at 10.6,43.5 h0.8 r270
  text "OUT" at 9.9,35 h0.8 r270
  text "HEAT" at 9.9,29.5 h0.8 r270
  text "SIG IN / 1P : SIG1 / 2P : SIG2 / 3P : GND" at 7.2,24.6 h0.8 r270
  text "COOL" at 9.8,15.3 h0.8 r270
Mechanical 1:
  circle w0.254: c70.6,48 r1.2
  circle w0.254: c70.6,19 r1.2
  circle w0.254: c4,4 r2.002
  circle w0.254: c81,4 r2.002
  circle w0.254: c81,76 r2.002
  circle w0.254: c4,76 r2.002
  lines w0.254: 0,79.1 cw(c0.9,79.1) 0.9,80 84.1,80 cw(c84.1,79.1) 85,79.1 85,0.9 cw(c84.1,0.9) 84.1,0 0.9,0 cw(c0.9,0.9) 0,0.9 0,79.1 ; 0,79.1 0,79.1

## Text inside footprints (layer, text, board x,y; h text height)
D5: Top Overlay "*" at 36.712,34.318 h1.27 r180
U1: Mechanical 13 "*" at 34.706,34.318 h1.27 r180